# EAGLE board megy_dole_v1 (EAGLE 6.3)
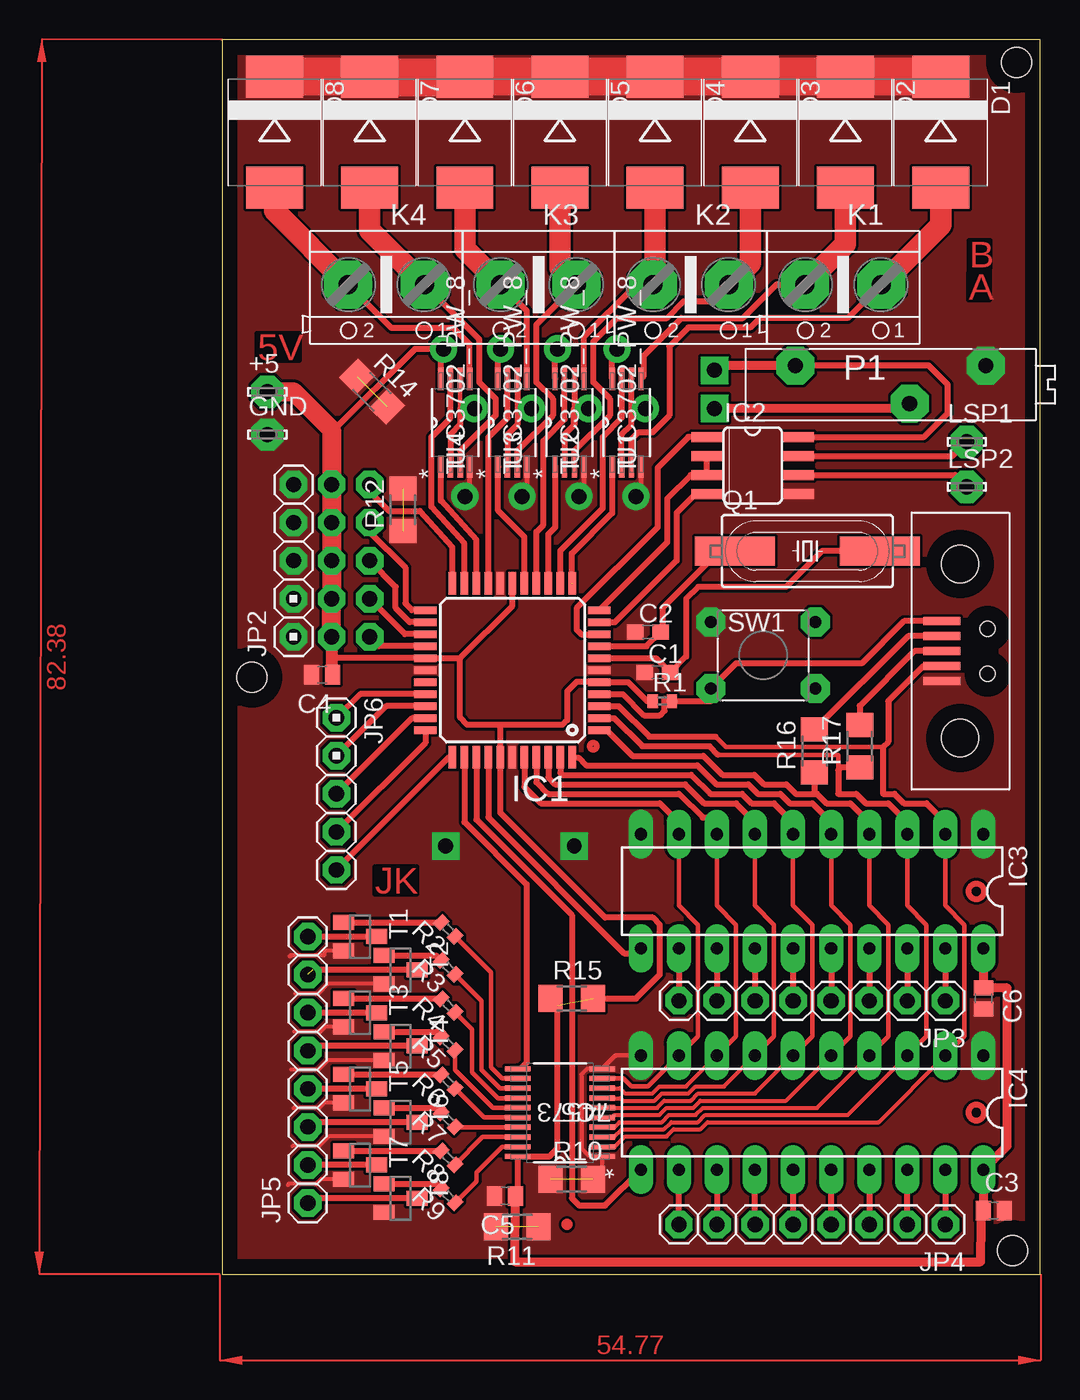
[diagram p0: board, top side]
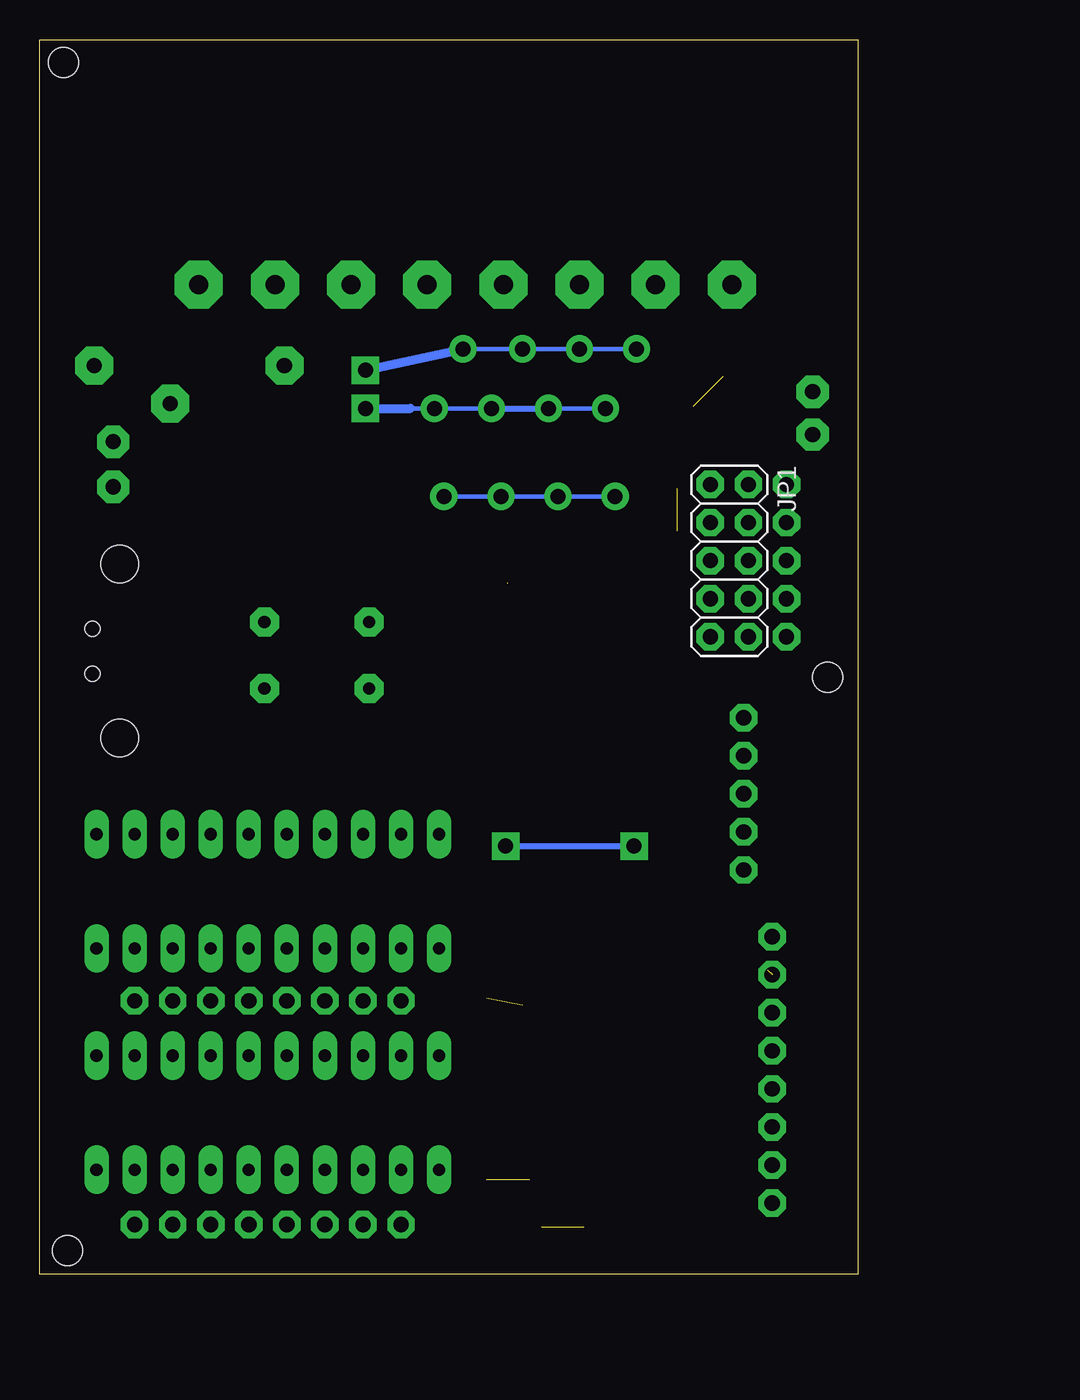
[diagram p1: board, bottom side, seen from below]

Size 54.59 x 82.38 mm. Coordinates in mm from the lower left corner, seen from the top.
Outline: 0,0 54.59,0 54.59,82.38 0,82.38 0,0
Copper layers (1*16): Top 0.035mm / dielectric 1.5mm / Bottom 0.035mm
Design rules "default *": minimum track width 0.15mm, minimum drill 24mil, track to track 0.18mm, track to pad 0.18mm, pad to pad 0.18mm, via to via 0.18mm, smd to smd 0.18mm, copper to edge 40mil, drill to drill 8mil, minimum pad ring 16mil, minimum via ring 16mil, stop-mask expansion 4mil, vias tented up to drill 0mil, thermal gap 10mil
Holes 2 mm at 53,80.86 2,39.86 52.75,1.61

## Footprints (pad centres in the part's own frame; a part is rotated, then mirrored left to right if it is on the bottom)
LSP10 = drill 1.016 pad 2.159 octagon: MP 0,0
C0603 = smd 1.1 x 1: 1 -0.85,0; 2 0.85,0
C0504 = smd 1 x 1.3: 1 -0.7,0; 2 0.7,0
SMC = smd 2.8 x 3.8: A 3.7,0; C -3.7,0
TQFP44 = smd 1.5 x 0.5: 1 -5.8,4; 2 -5.8,3.2; 3 -5.8,2.4; 4 -5.8,1.6; 5 -5.8,0.8; 6 -5.8,0; 7 -5.8,-0.8; 8 -5.8,-1.6; 9 -5.8,-2.4; 10 -5.8,-3.2; 11 -5.8,-4; 23 5.8,-4; 24 5.8,-3.2; 25 5.8,-2.4; 26 5.8,-1.6; 27 5.8,-0.8; 28 5.8,0; 29 5.8,0.8; 30 5.8,1.6; 31 5.8,2.4; 32 5.8,3.2; 33 5.8,4 | smd 0.5 x 1.5: 12 -4,-5.8; 13 -3.2,-5.8; 14 -2.4,-5.8; 15 -1.6,-5.8; 16 -0.8,-5.8; 17 0,-5.8; 18 0.8,-5.8; 19 1.6,-5.8; 20 2.4,-5.8; 21 3.2,-5.8; 22 4,-5.8; 34 4,5.8; 35 3.2,5.8; 36 2.4,5.8; 37 1.6,5.8; 38 0.8,5.8; 39 0,5.8; 40 -0.8,5.8; 41 -1.6,5.8; 42 -2.4,5.8; 43 -3.2,5.8; 44 -4,5.8
SO08 = smd 0.66 x 2.032: 1 -1.905,-3.073; 2 -0.635,-3.073; 3 0.635,-3.073; 4 1.905,-3.073; 5 1.905,3.073; 6 0.635,3.073; 7 -0.635,3.073; 8 -1.905,3.073
DIL20 = drill 0.813 long: 1 -11.43,-3.81; 2 -8.89,-3.81; 3 -6.35,-3.81; 4 -3.81,-3.81; 5 -1.27,-3.81; 6 1.27,-3.81; 7 3.81,-3.81; 8 6.35,-3.81; 9 8.89,-3.81; 10 11.43,-3.81; 11 11.43,3.81; 12 8.89,3.81; 13 6.35,3.81; 14 3.81,3.81; 15 1.27,3.81; 16 -1.27,3.81; 17 -3.81,3.81; 18 -6.35,3.81; 19 -8.89,3.81; 20 -11.43,3.81
PW20 = smd 1.676 x 0.356: 1 -2.819,2.921; 2 -2.819,2.286; 3 -2.819,1.626; 4 -2.819,0.965; 5 -2.819,0.33; 6 -2.819,-0.33; 7 -2.819,-0.965; 8 -2.819,-1.626; 9 -2.819,-2.286; 10 -2.819,-2.921; 11 2.819,-2.921; 12 2.819,-2.286; 13 2.819,-1.626; 14 2.819,-0.965; 15 2.819,-0.33; 16 2.819,0.33; 17 2.819,0.965; 18 2.819,1.626; 19 2.819,2.286; 20 2.819,2.921
2X05 = drill 1.016 octagon: 1 -5.08,-1.27; 2 -5.08,1.27; 3 -2.54,-1.27; 4 -2.54,1.27; 5 0,-1.27; 6 0,1.27; 7 2.54,-1.27; 8 2.54,1.27; 9 5.08,-1.27; 10 5.08,1.27
1X05 = drill 1.016 octagon: 1 -5.08,0; 2 -2.54,0; 3 0,0; 4 2.54,0; 5 5.08,0
1X08 = drill 1.016 octagon: 1 -8.89,0; 2 -6.35,0; 3 -3.81,0; 4 -1.27,0; 5 1.27,0; 6 3.81,0; 7 6.35,0; 8 8.89,0
ARK500/2 = drill 1.27 pad 3.2 octagon: 1 -2.54,0; 2 2.54,0
PM19 = drill 1.016 pad 2.54 octagon: A -6.35,1.27; B 6.35,1.27; C 1.27,-1.27
HC49UP = smd 5.334 x 1.93: 1 -4.826,0; 2 4.826,0
R0402 = smd 0.7 x 0.9: 1 -0.65,0; 2 0.65,0
R1206 = smd 1.6 x 1.803: 1 -1.422,0; 2 1.422,0
P-B1720 = drill 0.813 pad 1.93 octagon: 1 -3.493,-2.223; 2 -3.493,2.223; 3 3.493,-2.223; 4 3.493,2.223
SOT23 = smd 1 x 1.4: 1 -0.95,-1.1; 2 0.95,-1.1; 3 0,1.1
PW8 = smd 1.473 x 0.356: 1 -2.921,0.965; 2 -2.921,0.33; 3 -2.921,-0.33; 4 -2.921,-0.965; 5 2.921,-0.965; 6 2.921,-0.33; 7 2.921,0.33; 8 2.921,0.965
SEI-5 = smd 0.56 x 2.477: P$1 -2,-1.04; P$2 -1,-1.04; P$3 0,-1.04; P$4 1,-1.04; P$5 2,-1.04 | hole 2.5: -5.8,0.187; 5.8,0.187 | hole 1: -1.5,2.03; 1.5,2.03

## Placement (x,y rotation side)
+5  LSP10  [LSP10]  3.02,58.9 0 top
C1  [C0603]  29.05,40.16 0 top
C2  [C0603]  28.42,42.86 0 top
C3  100n  [C0504]  51.5,4.25 0 top
C4  100n  [C0504]  6.67,40 180 top
C5  100n  [C0504]  18.89,5.24 180 top
C6  100n  [C0504]  50.8,18.41 270 top
D1  ES3D  [SMC]  47.94,76.2 270 top
D2  [SMC]  41.59,76.2 270 top
D3  [SMC]  35.24,76.2 270 top
D4  [SMC]  28.89,76.2 270 top
D5  [SMC]  22.54,76.2 270 top
D6  [SMC]  16.19,76.2 270 top
D7  [SMC]  9.84,76.2 270 top
D8  [SMC]  3.49,76.2 270 top
GND  LSP10  [LSP10]  3.02,56.04 0 top
IC1  MEGA16-A  [TQFP44]  19.37,40.32 180 top
IC2  MAX485csa+  [SO08]  35.4,53.97 270 top
IC3  74AC573N  [DIL20]  39.37,25.56 180 top
IC4  74AC573N  [DIL20]  39.37,10.79 180 top
IC5  74573  [PW20]  22.54,10.79 180 top
JP1  [2X05]  8.57,47.62 270 bottom
JP2  [1X05]  4.76,47.62 90 top
JP3  [1X08]  39.37,18.26 180 top
JP4  [1X08]  39.37,3.33 180 top
JP5  [1X08]  5.71,13.65 90 top
JP6  [1X05]  7.62,32.07 270 top
K1  ARK500/2  [ARK500/2]  41.43,66.04 180 top
K2  ARK500/2  [ARK500/2]  31.27,66.04 180 top
K3  ARK500/2  [ARK500/2]  21.11,66.04 180 top
K4  ARK500/2  [ARK500/2]  10.95,66.04 180 top
LSP1  LSP10  [LSP10]  49.69,55.56 0 top
LSP2  LSP10  [LSP10]  49.69,52.55 0 top
P1  10K  [PM19]  44.61,59.37 0 top
Q1  [HC49UP]  39.05,48.26 0 top
R1  4K7  [R0402]  29.36,38.26 0 top
R2  220R  [R0402]  15.08,23.02 135 top
R3  220R  [R0402]  15.08,20.48 135 top
R4  220R  [R0402]  15.08,17.94 135 top
R5  220R  [R0402]  15.08,15.4 135 top
R6  220R  [R0402]  15.08,12.86 135 top
R7  220R  [R0402]  15.08,10.32 135 top
R8  220R  [R0402]  15.08,7.78 135 top
R9  220R  [R0402]  15.08,5.24 135 top
R10  [R1206]  23.34,6.35 0 top
R11  [R1206]  19.68,3.18 180 top
R12  [R1206]  12.06,51.03 90 top
R14  [R1206]  10,58.9 315 top
R15  [R1206]  23.34,18.41 0 top
R16  [R1206]  39.53,34.92 90 top
R17  [R1206]  42.55,35.24 90 top
SW1  P-B1720  [P-B1720]  36.1,41.31 0 top
T1  BSS138  [SOT23]  9.21,22.54 270 top
T2  BSS138  [SOT23]  11.91,20.32 270 top
T3  BSS138  [SOT23]  9.21,17.46 270 top
T4  BSS138  [SOT23]  11.91,15.24 270 top
T5  BSS138  [SOT23]  9.21,12.38 270 top
T6  BSS138  [SOT23]  11.91,10.16 270 top
T7  BSS138  [SOT23]  9.21,7.3 270 top
T8  BSS138  [SOT23]  11.91,5.08 270 top
U1  TLC3702_PW_8  [PW8]  26.99,56.83 90 top
U2  TLC3702_PW_8  [PW8]  23.18,56.83 90 top
U3  TLC3702_PW_8  [PW8]  19.37,56.83 90 top
U4  TLC3702_PW_8  [PW8]  15.56,56.83 90 top
U$1  SEI-5  [SEI-5]  49.05,41.59 270 top

## Library data of the parts
+5 GND LSP1 LSP2 = solpad
C1-C6 R1-R12 R14-R17 = rcl
D1-D8 = diode
IC1 = atmel; MPN: ATMEGA16-16AU; OC_FARNELL: 9171134; OC_NEWARK: 96K6515
IC2 = maxim; MF: MAXIM; MPN: MAX481CSA; OC_FARNELL: unknown; OC_NEWARK: 90C3817
IC3-IC5 = 74xx-eu
JP1-JP6 = pinhead
K1-K4 = #PaJa_konektory
P1 = #PaJa_30
Q1 = crystal; OC_FARNELL: unknown; OC_NEWARK: unknown
SW1 = #PaJa_prepinace
T1-T8 = transistor
U1-U4 = texas; DATASHEETURL: http://www.ti.com/lit/gpn/TLC3702; DESCRIPTION: Dual, Micropower, Push-Pull Outputs, LinCMOS(TM) Voltage Comparator; FAMILY_NAME: COMPARATOR; GENERIC_PART_NUMBER: TLC3702; INDUSTRY_STD_PKG_TYPE: TSSOP; MANUFACTURER: Texas Instruments; MANUFACTURER_PART_NUMBER: tlc3702_pw_8; PACKAGE_DESIGNATOR: PW; PIN_COUNT: 8; VENDOR: Texas Instruments
U$1 = con-samtec

## Nets
GND: C1.1 C2.1 C3.2 C4.2 C5.2 C6.2 D1.C D2.C D3.C D4.C D5.C D6.C D7.C D8.C GND.MP IC1.6 IC1.18 IC1.28 IC1.39 IC2.5 IC3.1 IC3.10 IC4.1 IC4.10 IC5.1 IC5.10 JP2.1 JP2.2 JP2.3 JP2.4 JP2.5 P1.B R10.1 R10.2 R11.1 R11.2 R12.1 R12.2 R14.1 R14.2 SW1.2 T1.2 T2.2 T3.2 T4.2 T5.2 T6.2 T7.2 T8.2 U1.4 U2.4 U3.4 U4.4 U$1.P$5
MISO: IC1.2 IC3.3 IC4.3 IC5.3 R17.1
MOSI: IC1.1 IC3.4 IC4.4 IC5.4 R16.1
N$1: IC1.10 IC2.4
N$2: IC1.11 IC2.2 IC2.3
N$3: IC2.7 LSP1.MP
N$4: IC1.9 IC2.1
N$5: IC1.37 IC3.11
N$6: IC2.6 LSP2.MP
N$7: C1.2 IC1.7 Q1.2
N$8: C2.2 IC1.8 Q1.1
N$9: IC1.26 JP1.9
N$10: IC1.25 JP1.7
N$11: IC1.24 JP1.5
N$12: IC1.23 JP1.3
N$13: IC1.22 JP1.1
N$14: IC1.40 IC3.9 IC4.9 IC5.9
N$15: IC1.41 IC3.8 IC4.8 IC5.8
N$16: IC1.42 IC3.7 IC4.7 IC5.7
N$17: IC1.12 U1.1
N$18: IC1.13 U1.7
N$19: IC1.20 U4.1
N$20: D1.A K1.1 U1.3
N$21: D2.A K1.2 U1.5
N$22: IC1.43 IC3.6 IC4.6 IC5.6
N$23: IC1.44 IC3.5 IC4.5 IC5.5
N$24: IC1.21 U4.7
N$25: D7.A K4.1 U4.3
N$26: D8.A K4.2 U4.5
N$27: P1.C U1.2 U1.6 U2.2 U2.6 U3.2 U3.6 U4.2 U4.6
N$28: IC1.14 U2.1
N$29: IC1.15 U2.7
N$30: D3.A K2.1 U2.3
N$31: D4.A K2.2 U2.5
N$32: IC1.16 U3.1
N$33: IC1.19 U3.7
N$34: D5.A K3.1 U3.3
N$35: D6.A K3.2 U3.5
N$36: R16.2 U$1.P$2
N$37: R17.2 U$1.P$3
N$39: IC4.19 JP4.1
N$40: IC4.18 JP4.2
N$41: IC4.17 JP4.3
N$42: IC4.16 JP4.4
N$43: IC3.19 JP3.1
N$44: IC3.18 JP3.2
N$45: IC3.17 JP3.3
N$46: IC3.16 JP3.4
N$47: IC3.15 JP3.5
N$48: IC3.14 JP3.6
N$49: IC3.13 JP3.7
N$50: IC3.12 JP3.8
N$51: IC4.15 JP4.5
N$52: IC4.14 JP4.6
N$53: IC4.13 JP4.7
N$54: IC4.12 JP4.8
N$55: IC1.36 IC4.11
N$57: IC1.35 IC5.11
N$58: IC5.12 R2.1
N$59: R2.2 T1.1
N$60: JP5.8 T1.3
N$61: R3.2 T2.1
N$62: IC5.13 R3.1
N$63: JP5.7 T2.3
N$64: IC5.19 R9.1
N$65: R4.2 T3.1
N$66: IC5.14 R4.1
N$67: JP5.6 T3.3
N$68: R5.2 T4.1
N$69: R6.2 T5.1
N$70: R7.2 T6.1
N$71: R8.2 T7.1
N$72: R9.2 T8.1
N$73: JP5.5 T4.3
N$74: JP5.4 T5.3
N$75: JP5.3 T6.3
N$76: JP5.2 T7.3
N$77: JP5.1 T8.3
N$78: IC5.18 R8.1
N$79: IC5.17 R7.1
N$80: IC5.16 R6.1
N$81: IC5.15 R5.1
N$82: IC1.30 JP6.1
N$83: IC1.31 JP6.2
N$84: IC1.32 JP6.3
N$85: IC1.33 JP6.4
N$86: IC1.34 JP6.5
RESET: IC1.4 R1.2 SW1.1 U$1.P$1
SCK: IC1.3 IC3.2 IC4.2 IC5.2 U$1.P$4
VCC: +5.MP C3.1 C4.1 C5.1 C6.1 IC1.5 IC1.17 IC1.27 IC1.38 IC2.8 IC3.20 IC4.20 IC5.20 JP1.2 JP1.4 JP1.6 JP1.8 JP1.10 P1.A R1.1 R15.1 R15.2 U1.8 U2.8 U3.8 U4.8

## Tracks (layer width: path | path; a pad name or v marks a point on that pad's centre or on a via)
GND  (via drill 1)  (4 unrouted)
  Top 0.254: IC5.10 24.35,13.72 23.97,13.34 23.97,8.41 24.45,7.94 25.27,7.94 IC5.1 25.36,6.95 R10.2 | T1.2 6.79,21.59 6.79,21.27 4.51,21.27 4.51,21.21 | T2.2 7.05,19.37 6.41,18.73 4.89,18.73 | T3.2 6.86,16.51 6.54,16.19 4.83,16.19 | T4.2 7.05,14.29 6.41,13.65 4.64,13.65 | T5.2 6.8,11.43 6.48,11.11 4.76,11.11 | T6.2 7.11,9.21 6.48,8.57 4.7,8.57 | T7.2 6.61,6.35 6.29,6.03 4.45,6.03 4.38,5.97
  Top 0.305: U4.4 16.52,52.24 v16.19,51.91 | U3.4 20.33,52.24 v20,51.91 | U2.4 24.14,52.24 v23.81,51.91 | U1.4 27.95,52.24 v27.62,51.91 | IC4.10 26.25,14.61 IC5.10
  Top 0.406: 23.02,28.58 v23.5,28.58 | v14.92,28.58 14.76,28.58
  Top 2.54: D1.C D2.C D3.C D4.C D5.C D6.C 16.4,79.9 16.35,79.85 10.05,79.85 D7.C D8.C
  Bottom 0.305: v16.19,51.91 v20,51.91 v23.81,51.91 v27.62,51.91
  Bottom 0.406: v23.5,28.58 v14.92,28.58
  pour Top (isolate 0.076, no thermals): 0,82.39 54.61,82.39 54.61,0 -0.16,0 -0.16,82.39
MISO
  Top 0.254: IC5.3 26.16,9.17 26.67,9.68 29.49,9.68 29.97,10.16 31.75,10.16 32.23,10.64 41.75,10.64 IC4.3
  Top 0.305: IC3.3 45.72,24.61 46.99,23.34 46.99,15.88 IC4.3 | 33.1,34.67 41.12,34.67 41.12,33.66
  Top 0.406: IC3.3 45.72,30.16 44.45,31.43 42.95,31.43 42.32,32.07 41.12,32.07 41.12,33.66 41.28,33.82 R17.1 | IC1.2 26.16,37.12 28.04,35.24 32.52,35.24 33.1,34.67
MOSI
  Top 0.254: IC5.4 26.18,9.83 26.51,10.16 29.33,10.16 29.81,10.64 31.59,10.64 32.07,11.11 39.69,11.11 IC4.4
  Top 0.305: IC3.4 43.18,24.61 44.45,23.34 44.45,15.88 IC4.4
  Top 0.406: IC3.4 43.18,30.16 41.91,31.43 40.32,31.43 39.69,32.07 39.53,32.07 | IC1.1 25.66,36.32 27.37,34.61 32.12,34.61 33.38,33.34 35.52,33.34 36.15,32.7 37.65,32.7 38.28,32.07 39.53,32.07 | R16.1 39.53,32.07
N$1
  Top 0.406: IC2.4 31.59,52.07 30.32,50.8 30.32,47.62 26.19,43.5 25.19,43.5 IC1.10
N$2
  Top 0.406: IC2.2 IC2.3 31.27,53.34 29.69,51.75 29.69,48.84 IC1.11
N$3
  Top 0.406: IC2.7 48.74,54.61 LSP1.MP
N$4
  Top 0.406: IC2.1 31.11,55.88 29.05,53.82 29.05,49.85 23.65,44.45 23.65,43.02 23.97,42.7 25.15,42.7 IC1.9
N$5
  Top 0.406: IC1.37 17.77,30.49 26.83,21.43 27.78,21.43 IC3.11
N$6
  Top 0.406: IC2.6 48.9,53.34 LSP2.MP
N$7
  Top 0.406: IC1.7 28.94,41.12 C1.2 30.96,41.22 30.96,45.09 31.75,45.88 37.62,45.88 40.01,48.26 Q1.2
N$8
  Top 0.406: IC1.8 28.33,41.92 C2.2 29.37,42.97 29.37,44.45 33.38,48.46 34.86,48.46 Q1.1
N$9
  Top 0.406: IC1.26 10.46,41.92 JP1.9
N$10
  Top 0.406: IC1.25 12.21,42.72 JP1.7
N$11
  Top 0.406: IC1.24 12.52,43.52 11.59,44.45 11.59,45.88 JP1.5
N$12
  Top 0.406: IC1.23 12.67,44.32 12.22,44.77 12.22,47.15 9.84,49.53 JP1.3
N$13
  Top 0.406: JP1.1 9.84,52.23 11.14,50.94 13.2,50.94 15.37,48.52 IC1.22
N$14
  Top 0.305: IC3.9 30.48,24.61 31.75,23.34 31.75,15.88 IC4.9 28.42,12.54 27.3,12.54 26.77,13.08 IC5.9
  Top 0.406: IC3.9 30.48,30.16 29.21,31.43 21.27,31.43 20.17,32.54 IC1.40
N$15
  Top 0.254: IC5.8 26.54,12.42 26.9,12.07 28.7,12.07 29.17,12.54 30.96,12.54 IC4.8
  Top 0.305: IC3.8 33.02,24.61 34.29,23.34 34.29,15.88 IC4.8
  Top 0.406: IC3.8 33.02,30.16 32.7,30.48 32.07,30.48 30.48,32.07 21.75,32.07 20.97,32.85 IC1.41
N$16
  Top 0.254: IC5.7 26.57,11.76 26.74,11.59 28.86,11.59 29.33,12.07 31.11,12.07 31.59,12.54 33.5,12.54 IC4.7
  Top 0.305: IC3.7 35.56,24.61 36.83,23.34 36.83,15.88 IC4.7
  Top 0.406: IC3.7 35.56,30.16 34.29,31.43 32.16,31.43 30.89,32.7 22.23,32.7 21.77,33.16 IC1.42
N$17  (1 unrouted)
  Top 0.406: U1.1 26.02,50.79 23.34,48.1 23.34,46.09
N$18
  Top 0.406: U1.7 26.66,57.14 25.4,55.88 25.4,51.12 22.57,48.28 IC1.13
N$19
  Top 0.305: 14.61,53.9 U4.1
  Top 0.406: IC1.20 16.97,49 14.61,51.62 14.61,53.9
N$20
  Top 0.406: U1.3 27.32,55.73 27.78,56.2 28.73,56.2 29.84,57.31 29.84,61.91 31.11,63.18 35.24,63.18 35.88,63.82 41.75,63.82 K1.1
  Top 1.422: D1.A 47.94,70.01 K1.1
N$21
  Top 0.406: 38.89,65.88 K1.2 36.99,66.04 34.77,63.82 30.64,63.82 28.1,61.28 28.1,59.9 U1.5
  Top 1.422: D2.A 41.59,68.74 K1.2
N$22
  Top 0.254: IC5.6 26.18,11.12 26.19,11.11 29.02,11.11 29.49,11.59 31.27,11.59 31.75,12.07 35.56,12.07 IC4.6
  Top 0.305: IC3.6 38.1,24.61 39.37,23.34 39.37,15.88 IC4.6
  Top 0.406: IC3.6 38.1,30.16 36.83,31.43 35.33,31.43 34.7,32.07 32.57,32.07 31.3,33.34 22.7,33.34 22.57,33.47 IC1.43
N$23
  Top 0.254: IC5.5 26.02,10.46 26.19,10.64 29.17,10.64 29.65,11.11 31.43,11.11 31.91,11.59 37.62,11.59 IC4.5
  Top 0.305: IC3.5 40.64,24.61 41.91,23.34 41.91,15.88 IC4.5
  Top 0.406: IC3.5 40.64,30.16 39.37,31.43 37.87,31.43 37.24,32.07 35.74,32.07 35.11,32.7 32.98,32.7 31.71,33.97 24.29,33.97 23.81,34.45 23.44,34.45 IC1.44
N$24
  Top 0.305: 15.24,59.74 U4.7
  Top 0.406: IC1.21 16.17,48.76 13.97,51.21 13.97,55.88 15.24,57.15 15.24,59.74
N$25
  Top 0.305: U4.3 15.89,54.94
  Top 0.406: K4.1 17.14,62.39 17.14,59.53 18.26,58.42 18.26,57.31 15.89,54.94
  Top 1.422: D7.A 9.84,69.69 K4.1
N$26
  Top 0.406: U4.5 16.52,62.06 15.43,63.15 11.3,63.15 K4.2
  Top 1.422: D8.A 3.49,70.96 K4.2
N$27  (via drill 1)
  Top 0.305: 19.7,56.69 19.68,56.67 19.68,57.63 20,57.78 v20.64,57.78 | U3.2 | U4.6 15.89,57.78 v16.83,57.78 | U4.2 | 23.5,56.67 23.51,56.69 | 23.5,57.78 v24.45,57.78 | 27.3,57.78 v28.26,57.78
  Top 0.406: U1.2 26.66,56.03 27.3,56.67 27.3,57.78 27.3,59.74 U1.6 | U2.6 23.51,56.69 | U2.2 22.86,56.04 23.5,56.67 23.5,57.78 | U3.6 19.7,56.69 | U3.2 19.05,56.04 19.68,56.67 | 15.89,57.78 15.89,56.69 15.24,56.04 U4.2
  Top 0.61: P1.C 45.56,57.78 v32.86,57.78
  Bottom 0.305: 29.84,57.78 v28.26,57.78 v24.45,57.78 | v20.64,57.78 v16.83,57.78
  Bottom 0.406: v24.45,57.78 v20.64,57.78
  Bottom 0.61: v32.86,57.78 29.84,57.78
N$28
  Top 0.305: 21.75,46.14 IC1.14
  Top 0.406: U2.1 22.21,49.83 21.75,49.37 21.75,46.14
N$29
  Top 0.305: 22.86,59.74 U2.7
  Top 0.406: IC1.15 20.97,49.54 21.43,50.01 21.43,55.63 22.86,57.06 22.86,59.74
N$30
  Top 0.406: U2.3 23.5,53.92 23.5,54.93 25.88,57.31 25.88,58.42 24.77,59.53 24.77,62.23 26.35,63.82 29.69,63.82 30.8,64.93 32.7,64.93 K2.1
  Top 1.422: D3.A 35.24,67.47 K2.1
N$31
  Top 0.305: 28.57,65.88 K2.2
  Top 0.406: U2.5 24.14,62.56 27.46,65.88 28.57,65.88
  Top 1.422: D4.A 28.89,66.2 K2.2
N$32
  Top 0.305: 18.41,53.9 U3.1
  Top 0.406: IC1.16 20.17,49.21 18.41,50.96 18.41,53.9
N$33
  Top 0.305: 19.05,59.74 U3.7
  Top 0.406: IC1.19 17.77,55.87 19.05,57.15 19.05,59.74
N$34
  Top 0.305: 19.68,53.92 U3.3
  Top 0.406: K3.1 20.95,63.34 20.95,59.53 22.07,58.42 22.07,57.31 19.68,54.93 19.68,53.92
  Top 1.422: D5.A 22.54,67.15 K3.1
N$35
  Top 0.406: U3.5 20.33,64.28 K3.2
  Top 1.422: D6.A 16.19,68.42 K3.2
N$36
  Top 0.406: U$1.P$2 45.77,42.59 R16.2
N$37
  Top 0.406: U$1.P$3 46.2,41.59 42.55,37.94 R17.2
N$39
  Top 0.406: IC4.19 JP4.1
N$40
  Top 0.406: JP4.2 IC4.18
N$41
  Top 0.406: IC4.17 JP4.3
N$42
  Top 0.406: JP4.4 IC4.16
N$43
  Top 0.406: IC3.19 JP3.1
N$44
  Top 0.406: IC3.18 JP3.2
N$45
  Top 0.406: IC3.17 JP3.3
N$46
  Top 0.406: IC3.16 JP3.4
N$47
  Top 0.406: IC3.15 JP3.5
N$48
  Top 0.406: IC3.14 JP3.6
N$49
  Top 0.406: IC3.13 JP3.7
N$50
  Top 0.406: IC3.12 JP3.8
N$51
  Top 0.406: IC4.15 JP4.5
N$52
  Top 0.406: JP4.6 IC4.14
N$53
  Top 0.406: IC4.13 JP4.7
N$54
  Top 0.406: JP4.8 IC4.12
N$55
  Top 0.406: IC1.36 16.97,30.34 23.34,23.97 23.34,5.08 23.81,4.6 25.56,4.6 IC4.11
N$57
  Top 0.406: IC5.11 19.91,13.72 20.32,14.13 20.32,26.04 16.17,30.19 IC1.35
N$58
  Top 0.305: IC5.12 18.67,13.08 17.94,13.81 17.94,20.16 R2.1
N$59
  Top 0.406: T1.1 14.61,23.49 R2.2
N$60
  Top 0.406: JP5.8 T1.3
N$61
  Top 0.406: T2.1 14.29,21.27 R3.2
N$62
  Top 0.305: IC5.13 18.54,12.42 17.3,13.65 17.3,18.26 R3.1
N$63  (1 unrouted)
  Top 0.406: T2.3 6.03,20.32
N$64
  Top 0.305: IC5.19 18.67,8.51 16.99,6.83 16.99,6.22 R9.1
N$65
  Top 0.406: T3.1 14.61,18.41 R4.2
N$66
  Top 0.305: IC5.14 18.4,11.76 16.67,13.49 16.67,16.35 R4.1
N$67
  Top 0.406: T3.3 JP5.6
N$68
  Top 0.406: T4.1 14.29,16.19 R5.2
N$69
  Top 0.406: T5.1 14.61,13.33 R6.2
N$70
  Top 0.406: T6.1 14.29,11.11 R7.2
N$71
  Top 0.406: T7.1 14.61,8.25 R8.2
N$72
  Top 0.406: T8.1 14.29,6.03 R9.2
N$73
  Top 0.406: T4.3 6.03,15.24 JP5.5
N$74
  Top 0.406: T5.3 JP5.4
N$75
  Top 0.406: T6.3 6.03,10.16 JP5.3
N$76
  Top 0.406: T7.3 JP5.2
N$77
  Top 0.406: T8.3 6.03,5.08 JP5.1
N$78
  Top 0.305: IC5.18 17.39,9.17 R8.1
N$79
  Top 0.305: IC5.17 15.57,9.83 R7.1
N$80
  Top 0.305: IC5.16 17.48,10.46 R6.1
N$81
  Top 0.305: IC5.15 18.09,11.12 15.56,13.65 15.56,14.92 R5.1
N$82
  Top 0.406: IC1.30 9.22,38.72 JP6.1
N$83
  Top 0.406: IC1.31 10.94,37.92 JP6.2
N$84
  Top 0.406: IC1.32 12.68,37.12 JP6.3
N$85
  Top 0.406: IC1.33 13.57,35.48 JP6.4
N$86
  Top 0.406: IC1.34 15.15,34.52 JP6.5
RESET
  Top 0.406: IC1.4 26.74,38.72 28.16,37.31 29.21,37.31 29.53,37.62 29.53,38.4 R1.2 32.61,38.26 SW1.1 34.29,40.77 42.67,40.77 45.5,43.59 U$1.P$1
SCK
  Top 0.254: IC5.2 26.19,8.51 26.89,9.21 29.65,9.21 30.13,9.68 31.91,9.68 32.38,10.16 43.81,10.16 IC4.2
  Top 0.305: IC3.2 48.26,24.61 49.53,23.34 49.53,15.88 IC4.2 | 32.93,35.88 33.63,35.18 44.1,35.18
  Top 0.406: IC1.3 26.46,37.92 28.51,35.88 32.93,35.88 | IC3.2 48.26,30.16 46.99,31.43 45.49,31.43 44.86,32.07 44.1,32.07 44.1,35.18 44.45,35.53 44.45,38.26 46.78,40.59 U$1.P$4
VCC  (via drill 1)  (1 unrouted)
  Top 0.406: U4.8 14.59,61.58 v14.76,61.75 12.86,61.75 7.46,56.36 | U3.8 18.4,61.58 v18.57,61.75 | U2.8 22.21,61.58 v22.38,61.75 | U1.8 26.02,61.42 v26.35,61.75 | 18.57,36.67 22.7,36.67 23.02,36.99 23.02,38.89 23.65,39.53 IC1.5 27.09,39.52 28.35,38.26 R1.1 | 18.57,36.67 16.35,36.67 15.88,37.15 15.88,41.12 | 15.88,41.12 19.37,44.61 IC1.17 | 15.88,41.12 IC1.27 7.37,41.12 C4.1 | 18.57,36.67 IC1.38 18.57,30.8 25.56,23.81 28.73,23.81 29.21,23.34 29.21,20 27.62,18.41 R15.2 | C5.1 19.72,5.37 IC5.20 21.84,7.87 22.38,8.41 22.38,17.95 R15.1 | IC2.8 46.83,55.88 48.42,57.47 48.42,59.37 47.15,60.64 P1.A
  Top 0.61: P1.A 33.18,60.64 v32.86,60.33 32.74,60.44 32.32,60.44 | IC3.20 C6.1 52.39,19.12 52.39,8.57 IC4.20 C3.1 50.64,4.03 50.64,3.49 50.61,0.86 19.53,0.86 C5.1
  Top 0.813: 7.3,56.36 7.46,56.36 | JP1.10 7.3,40.07 C4.1
  Top 1.27: +5.MP 4.76,58.9 7.3,56.36 JP1.2 JP1.4 JP1.6 JP1.8 JP1.10
  Bottom 0.305: v14.76,61.75 v18.57,61.75 v22.38,61.75 v26.35,61.75
  Bottom 0.61: v32.86,60.33 v26.35,61.75
(copper drawn outside any net)
  shapes: Top area x2, Top circle x4

## Text on the board
Top: B | A | 5V | JK